# Altium PCB EMv2MainBoard.PcbDoc
Units mm, origin at the board's own origin, x right, y up, seen from the top; angles counter-clockwise.
Board outline 99.95 x 99.95 mm, 2 copper layers (Top Layer, Bottom Layer); 115 components, 87 nets, 518 pads, 5 vias.
Unrouted connection lines stored in the file: 279.
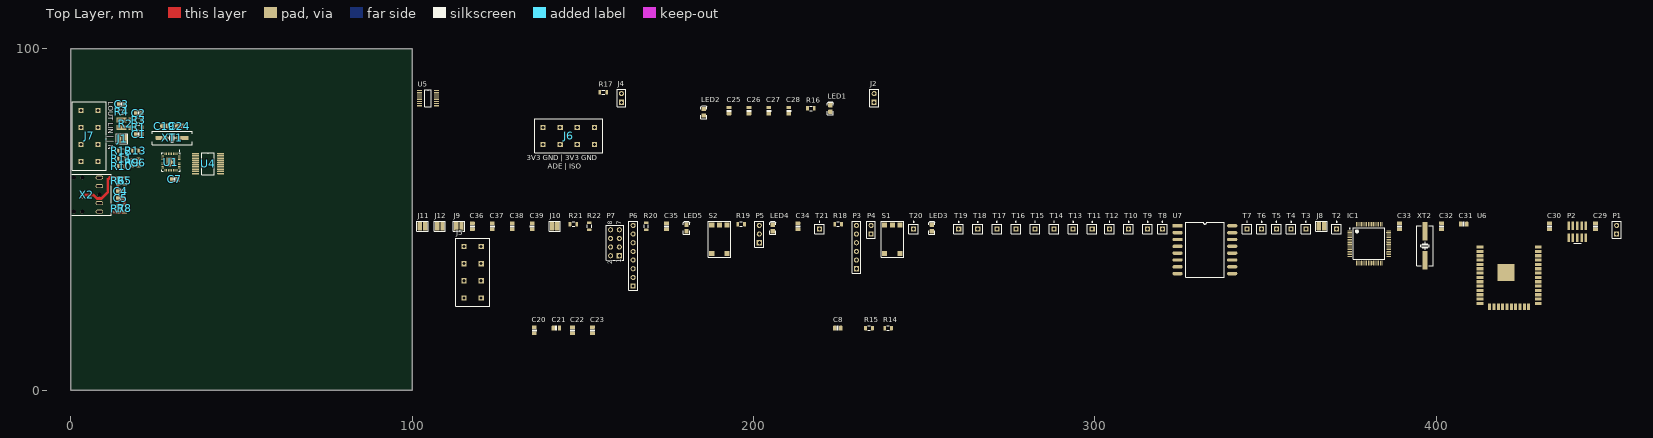
[diagram p0: Top Layer view]
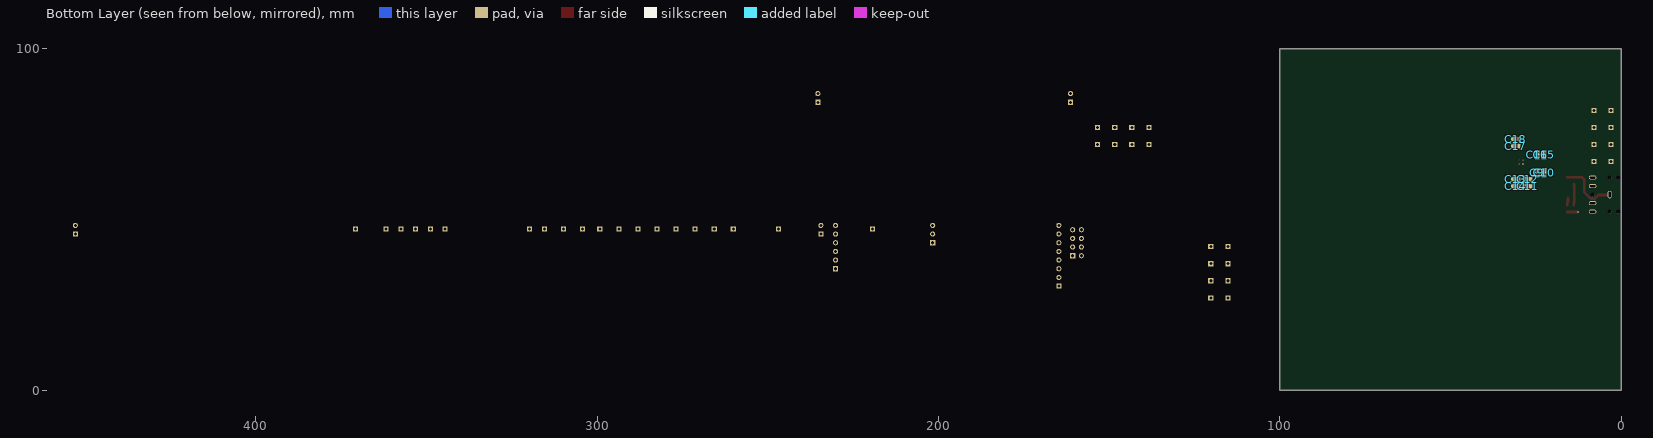
[diagram p1: Bottom Layer view, seen from below]

## Layer stack, top to bottom
Top Solder: solder mask 0.0102, Solder Resist, Dk 3.5
Top Layer: signal copper 0.0356
Dielectric 1: dielectric 0.32, FR-4, Dk 4.8
Bottom Layer: signal copper 0.0356
Bottom Solder: solder mask 0.0102, Solder Resist, Dk 3.5

## Board outline
0,0 99.949,0 99.949,99.949 0,99.949

## Design rules (kind name [scope] priority, off if disabled: settings)
Clearance [All] p1: gap=0.127 ignorepadtopadclearanceinfootprint=FALSE
ComponentClearance [All] p1 off: gap=0.254 collisioncheckmode=3 verticalgap=0.254 showdistances=FALSE
Height [All] p1 off: minheight=0 maxheight=25.4 prefheight=12.7
PolygonConnect [All] p1: connectstyle=Relief reliefconductorwidth=0.254 reliefentries=4 polygonreliefangle="90 Angle" airgapwidth=0.254
RoomDefinition Isolation_Circuit [InComponentClass('Isolation_Circuit')] p1 off: confinementstyle=ConfineIn formatcopy=TRUE lockcomponents=FALSE outline 101.092,53.467 265.938,53.467 265.938,90.932 101.092,90.932
RoomDefinition Designator [InComponentClass('Designator')] p2 off: confinementstyle=ConfineIn formatcopy=TRUE lockcomponents=FALSE outline 101.092,23.114 454.406,23.114 454.406,52.324 101.092,52.324
RoomDefinition Designator [InComponentClass('Designator')] p3 off: confinementstyle=ConfineIn formatcopy=TRUE lockcomponents=FALSE outline 101.092,23.114 454.406,23.114 454.406,52.324 101.092,52.324
RoutingVias [All] p1: holewidth=0.35 width=0.65 viastyle="Through Hole" minholewidth=0.35 minwidth=0.65 maxholewidth=0.711 maxwidth=1.27
SolderMaskExpansion [All] p1: expansion=0.102
Width [All] p1: maxlimit=2 minlimit=0.254 preferedwidth=0.254
28 further rules are at their usual default settings.

## Classes and differential pairs
component class Isolation_Circuit: C25 C26 C27 C28 J2 J4 J5 J6 J7 LED1 LED2 R16 R17 U4 U5
component class Designator: C29 C30 C31 C32 C33 C34 C35 C36 C37 C38 C39 IC1 J8 J9 J10 J11 J12 LED3 LED4 LED5 P1 P2 P3 P4 P5 P6 P7 R18 R19 R20 R21 R22 S1 S2 T2 T3 T4 T5 T6 T7 T8 T9 T10 T11 T12 T13 T14 T15 T16 T17 T18 T19 T20 T21 U6 U7 XT2

## Components (designator, comment, footprint, x,y, rotation, side; value= is the part's Value field where it differs from the comment)
C1 "approved sub OK" CAPC2012X135N 19.823,74.93 r180 top value=100n
C2 "approved sub OK" CAPC2012X135N 19.801,81.153 r0 top value=100n
C3 "approved sub OK" CAPC2012X135N 14.848,83.693 r0 top value=100n
C4 "approved sub OK" CAPC2012X135N 14.639,58.293 r180 top value=100n
C5 "approved sub OK" CAPC2012X135N 14.628,56.261 r0 top value=100n
C6 "approved sub OK" CAPC2012X135N 19.812,66.686 r90 top value=15n
C7 "approved sub OK" CAPC2012X135N 30.393,61.722 r180 top value=47n
C8 "approved sub OK" CAPC2012X135N 224.663,18.161 r0 top value=1u
C9 "approved sub OK" CAPC2012X135N 24.562,63.638 r270 bottom value=4.7u
C10 "approved sub OK" CAPC2012X135N 22.53,63.627 r270 bottom value=100n
C11 "approved sub OK" CAPC2012X135N 27.356,59.69 r0 bottom value=4.7u
C12 "approved sub OK" CAPC2012X135N 27.345,61.722 r0 bottom value=100n
C13 "approved sub OK" CAPC2012X135N 30.785,61.722 r180 bottom value=470n
C14 "approved sub OK" CAPC2012X135N 30.785,59.69 r180 bottom value=100n
C15 "approved sub OK" CAPC2012X135N 22.53,68.95 r90 bottom value=4.7u
C16 "approved sub OK" CAPC2012X135N 24.562,68.95 r90 bottom value=100n
C17 "approved sub OK" CAPC2012X135N 30.785,71.501 r0 bottom value=4.7u
C18 "approved sub OK" CAPC2012X135N 30.785,73.533 r0 bottom value=100n
C19 "approved sub OK" CAPC2012X135N 27.472,77.343 r180 top value=20n
C20 "approved sub OK" CAPC2012X135N 135.763,17.526 r90 top value=4.7u
C21 "approved sub OK" CAPC2012X135N 142.24,18.161 r0 top value=100n
C22 "approved sub OK" CAPC2012X135N 146.939,17.526 r90 top value=4.7u
C23 "approved sub OK" CAPC2012X135N 152.781,17.526 r90 top value=100n
C24 "approved sub OK" CAPC2012X135N 31.801,77.343 r0 top value=20n
C25 "approved sub OK" CAPC2012X135N 192.786,81.915 r90 top value=100n
C26 "approved sub OK" CAPC2012X135N 198.628,81.915 r90 top value=100n
C27 "approved sub OK" CAPC2012X135N 204.47,81.915 r90 top value=100n
C28 "approved sub OK" CAPC2012X135N 210.312,81.915 r90 top value=100n
C29 "approved sub OK" CAPC2012X135N 446.659,48.006 r90 top value=10u
C30 "approved sub OK" CAPC2012X135N 433.197,48.006 r90 top value=100n
C31 "approved sub OK" CAPC2012X135N 408.051,48.641 r0 top value=4.7u
C32 "approved sub OK" CAPC2012X135N 401.574,48.006 r90 top value=27p
C33 "approved sub OK" CAPC2012X135N 389.255,48.006 r90 top value=27p
C34 "approved sub OK" CAPC2012X135N 212.979,48.006 r90 top value=100n
C35 "approved sub OK" CAPC2012X135N 174.498,48.006 r90 top value=100n
C36 "approved sub OK" CAPC2012X135N 117.602,48.006 r90 top value=100n
C37 "approved sub OK" CAPC2012X135N 123.444,48.006 r90 top value=100n
C38 "approved sub OK" CAPC2012X135N 129.286,48.006 r90 top value=100n
C39 "approved sub OK" CAPC2012X135N 135.128,48.006 r90 top value=100n
IC1 "STM32F410RBT6" STM32F410RBT6 380.365,42.926 r0 top
J1 "Jumper" JUMP1 14.986,73.66 r180 top
J2 "Jumper" HDR1X2 235.331,84.328 r90 top
J4 "Jumper" HDR1X2 161.29,84.328 r90 top
J5 "SPTAF 1/4-5-LL" "SPTAF 1/4-5-LL" 115.189,42.037 r0 top
J6 "SPTAF 1/4-5-LL" "SPTAF 1/4-5-LL" 138.336,71.962 r90 top
J7 "SPTAF 1/4-5-LL" "SPTAF 1/4-5-LL" 7.921,66.962 r180 top
J8 "Jumper" JUMP1 366.395,48.006 r0 top
J9 "Jumper" JUMP1 113.665,48.006 r0 top
J10 "Jumper" JUMP1 141.732,48.006 r0 top
J11 "Jumper" JUMP1 102.997,48.006 r0 top
J12 "Jumper" JUMP1 108.077,48.006 r0 top
LED1 "Green" LED-0805-K 222.504,82.486 r90 top
LED2 "Green" LED-0805-K 185.42,81.407 r90 top
LED3 "Green" LED-0805-K 252.222,47.498 r90 top
LED4 "Green" LED-0805-K 205.613,47.498 r90 top
LED5 "Green" LED-0805-K 180.34,47.498 r90 top
P1 "Header 2" HDR1X2 452.882,45.72 r90 top
P2 "SWD connector" "SWD connector" 438.785,44.704 r0 top
P3 "Header 6" HDR1X6 230.124,35.56 r90 top
P4 "Header 2" HDR1X2 234.442,45.72 r90 top
P5 "Header 3" HDR1X3 201.676,43.18 r90 top
P6 "LCD" HDR1X8 164.719,30.48 r90 top
P7 "NRF24L01" HDR2X4 160.655,39.37 r90 top
R1 "Thick Film" RESC2012X70N 19.812,76.962 r180 top value=100K
R2 "WSK1216" WSK1216 14.859,79.121 r270 top
R3 "Thick Film" RESC2012X70N 19.828,79.121 r180 top value=100K
R4 "Thick Film" RESC2012X70N 14.875,81.534 r0 top value=0R
R5 "Thick Film" RESC2012X70N 15.748,61.341 r90 top value=100K
R6 "Thick Film" RESC2012X70N 13.843,61.341 r270 top value=100K
R7 "Thick Film" RESC2012X70N 13.843,53.197 r270 top value=100K
R8 "Thick Film" RESC2012X70N 15.748,53.213 r270 top value=100K
R9 "Thick Film" RESC2012X70N 17.907,66.675 r90 top value=1K
R10 "Thick Film" RESC2012X70N 14.843,65.532 r180 top value=250K
R11 "Thick Film" RESC2012X70N 14.875,67.818 r0 top value=250K
R12 "Thick Film" RESC2012X70N 14.875,70.104 r180 top value=250K
R13 "Thick Film" RESC2012X70N 18.923,70.104 r180 top value=250K
R14 "Thick Film" RESC2012X70N 239.395,18.161 r0 top value=10K
R15 "Thick Film" RESC2012X70N 233.807,18.161 r0 top value=10K
R16 "Thick Film" RESC2012X70N 216.789,82.55 r0 top value=1K
R17 "Thick Film" RESC2012X70N 155.956,87.249 r0 top value=1K
R18 "Thick Film" RESC2012X70N 224.79,48.641 r0 top value=1K
R19 "Thick Film" RESC2012X70N 196.342,48.641 r0 top value=1K
R20 "Thick Film" RESC2012X70N 168.529,48.006 r90 top value=1K
R21 "Thick Film" RESC2012X70N 147.193,48.641 r0 top value=1K
R22 "Thick Film" RESC2012X70N 151.892,48.006 r90 top value=1K
S1 "SMD_BUTTON" SMD_BUTTON 240.665,44.196 r90 top
S2 "SMD_BUTTON" SMD_BUTTON 189.992,44.196 r90 top
T2 "Test Point" PIN1 370.84,47.244 r0 top
T3 "Test Point" PIN1 361.823,47.244 r0 top
T4 "Test Point" PIN1 357.505,47.244 r0 top
T5 "Test Point" PIN1 353.187,47.244 r0 top
T6 "Test Point" PIN1 348.869,47.244 r0 top
T7 "Test Point" PIN1 344.551,47.244 r0 top
T8 "Test Point" PIN1 319.786,47.244 r0 top
T9 "Test Point" PIN1 315.468,47.244 r0 top
T10 "Test Point" PIN1 309.88,47.244 r0 top
T11 "Test Point" PIN1 299.212,47.244 r0 top
T12 "Test Point" PIN1 304.292,47.244 r0 top
T13 "Test Point" PIN1 293.624,47.244 r0 top
T14 "Test Point" PIN1 288.036,47.244 r0 top
T15 "Test Point" PIN1 282.448,47.244 r0 top
T16 "Test Point" PIN1 276.86,47.244 r0 top
T17 "Test Point" PIN1 271.272,47.244 r0 top
T18 "Test Point" PIN1 265.684,47.244 r0 top
T19 "Test Point" PIN1 260.096,47.244 r0 top
T20 "Test Point" PIN1 246.888,47.244 r0 top
T21 "Test Point" PIN1 219.329,47.244 r0 top
U1 "ADE9153A" CP-32-12_L 29.261,66.802 r270 top
U4 "MAX14483" SSOP20 36.5,69.29 r0 top
U5 "SI8663BB-B-IU" QSOP16 102.108,87.757 r0 top
U6 "ESP32-WROOM-32U" ESP32-WROOM-32U 412.877,41.91 r0 top
U7 "Ra-02 LoRa" "Ra-02 LoRa" 324.231,48.133 r0 top
X2 "35RAPC4BHN2" "35RAPC _ _ HN2" 4.572,57.277 r0 top
XT1 "12.288 MHz" ABLS7M2 29.642,73.914 r180 top
XT2 "20.00MHz" CRYSTAL_HC49-US-SM 396.748,42.291 r90 top

## Footprints (in the part's own frame and the unit in brackets; to place one, negate y for a bottom-side part, rotate by r counter-clockwise, add the part's x,y. Pads: shape width x height; smd on the part's side, far side on the other; paste and mask are expansions set on the pad)
"35RAPC _ _ HN2" [mm] "Switchcraft 3.5mm audio jack"
  round 1 hole 1.2 unplated: 0(-3.75,-5) 0(-3.75,5) 0(-1.25,-5) 0(-1.25,5) 0(3.75,0)
  oval 1.2x2.2 hole 0.6 slot 1.6 at 90 deg: 1(-1.25,0)
  oval 2.2x1.2 hole 0.6 slot 1.6 at 0 deg: 2(3.75,-5) 3(3.75,5) 10(3.75,-2.5) 11(3.75,2.5)
  silkscreen extent -4.35,-6 7.25,6, body extent -7.75,-6 6.25,6, height 5.7
ABLS7M2 [mm] "SMD Crystal HC49/US-SM package"
  round 0.508 on Mech15: 0(0,0)
  rrect25% 3.5x1.2 smd: 1(-3.07,0) 2(3.07,0)
  silkscreen extent -5.84,-1.96 5.84,1.96
CAPC2012X135N [mm] "Chip Capacitor, Body 2.0x1.2mm, EIA 0805, IPC Medium Density"
  round 0.254 on Mech15: 0(0,0)
  rrect25% 1x1.4 smd: 1(-0.9,0) 2(0.9,0)
  Top Layer pour cut-out: -0.675,0.7 -0.475,0.9 0.475,0.9 0.675,0.7 0.675,-0.7 0.475,-0.9 -0.475,-0.9 -0.675,-0.7
  silkscreen extent -0.15,-0.65 0.15,0.65, body extent -1.1,-0.72 1.1,0.73, height 1.34
CP-32-12_L [mm] "QFN, 32-Leads, Body 5x5mm, Pitch 0.5mm, Thermal Pad 2.6x2.6mm, IPC High Density"
  oval 0.75x0.25 smd: 1(-2.425,1.75) 2(-2.425,1.25) 3(-2.425,0.75) 4(-2.425,0.25) 5(-2.425,-0.25) 6(-2.425,-0.75) 7(-2.425,-1.25) 8(-2.425,-1.75) 17(2.425,-1.75) 18(2.425,-1.25) 19(2.425,-0.75) 20(2.425,-0.25) 21(2.425,0.25) 22(2.425,0.75) 23(2.425,1.25) 24(2.425,1.75)
  oval 0.25x0.75 smd: 9(-1.75,-2.425) 10(-1.25,-2.425) 11(-0.75,-2.425) 12(-0.25,-2.425) 13(0.25,-2.425) 14(0.75,-2.425) 15(1.25,-2.425) 16(1.75,-2.425) 25(1.75,2.425) 26(1.25,2.425) 27(0.75,2.425) 28(0.25,2.425) 29(-0.25,2.425) 30(-0.75,2.425) 31(-1.25,2.425) 32(-1.75,2.425)
  rect 2.6x2.6 smd: 33(0,0)
  silkscreen extent -3.47,-2.7 2.7,2.7, body extent -2.55,-2.55 2.55,2.55, height 0.8
CRYSTAL_HC49-US-SM [mm] "SMD Crystal HC49/US-SM package"
  round 0.508 on Mech15: 0(0,0)
  rrect25% 5.5x1.5 smd: 1(-4.25,0) 2(4.25,0)
  silkscreen extent -5.84,-2.41 5.84,2.41, body extent -6.4,-2.41 6.4,2.42, height 4.29
ESP32-WROOM-32U [mm]
  rect 2x0.9 smd: 1(0,0) 2(0,-1.27) 3(0,-2.54) 4(0,-3.81) 5(0,-5.08) 6(0,-6.35) 7(0,-7.62) 8(0,-8.89) 9(0,-10.16) 10(0,-11.43) 11(0,-12.7) 12(0,-13.97) 13(0,-15.24) 14(0,-16.51) 25(17,-16.51) 26(17,-15.24) 27(17,-13.97) 28(17,-12.7) 29(17,-11.43) 30(17,-10.16) 31(17,-8.89) 32(17,-7.62) 33(17,-6.35) 34(17,-5.08) 35(17,-3.81) 36(17,-2.54) 37(17,-1.27) 38(17,0)
  rect 0.9x2 smd: 15(2.78,-17.51) 16(4.05,-17.51) 17(5.32,-17.51) 18(6.59,-17.51) 19(7.86,-17.51) 20(9.13,-17.51) 21(10.4,-17.51) 22(11.67,-17.51) 23(12.94,-17.51) 24(14.21,-17.51)
  rect 5x5 smd: 38(7.56,-7.47)
  body extent -0.57,-17.89 17.51,7.65, height 3
HDR1X2 [mm] "Connector; Header; 2 Position"
  rect 1.5x1.5 hole 0.9: 1(0,0)
  round 1.5 hole 0.9: 2(2.54,0)
  silkscreen extent -1.27,-1.27 3.81,1.27
HDR1X3 [mm] "Connector; Header; 3 Position"
  rect 1.5x1.5 hole 0.9: 1(0,0)
  round 1.5 hole 0.9: 2(2.54,0) 3(5.08,0)
  silkscreen extent -1.27,-1.27 6.35,1.27
HDR1X6 [mm] "Connector; Header; 6 Position"
  rect 1.5x1.5 hole 0.9: 1(0,0)
  round 1.5 hole 0.9: 2(2.54,0) 3(5.08,0) 4(7.62,0) 5(10.16,0) 6(12.7,0)
  silkscreen extent -1.27,-1.27 13.97,1.27
HDR1X8 [mm] "Connector; Header; 8 Position"
  rect 1.5x1.5 hole 0.9: 1(0,0)
  round 1.5 hole 0.9: 2(2.54,0) 3(5.08,0) 4(7.62,0) 5(10.16,0) 6(12.7,0) 7(15.24,0) 8(17.78,0)
  silkscreen extent -1.27,-1.27 19.05,1.27
HDR2X4 [mm] "Connector; Header; 4x2 Position"
  rect 1.5x1.5 hole 0.9: 1(0,0)
  round 1.5 hole 0.9: 2(0,2.54) 3(2.54,0) 4(2.54,2.54) 5(5.08,0) 6(5.08,2.54) 7(7.62,0) 8(7.62,2.54)
  silkscreen extent -1.27,-1.27 8.89,3.81
JUMP1 [mil] "SMT Battery jumper pads"
  rrect25% 50x100 smd: 1(-30,0) 2(30,0)
  rrect25% 118x108 on Top Solder: SM(0,0)
  silkscreen extent -65,-60 65,60
LED-0805-K [mil]
  round 20 on Mech15: 0(0,0)
  rrect25% 50x50 smd: A(-37.5,0) K(37.5,0)
  Top Layer pour cut-out: -15,30 15,30 15,-30 -15,-30
  silkscreen extent -72,-35 77,35, body extent -39,-25 39,25, height 31
PIN1 [mm] "Generic Antenna; 1 Lead"
  rect 1.5x1.5 hole 0.9: 1(0,0)
  silkscreen extent -1.4,-1.4 1.4,2.17
QSOP16 [mm]
  rect 1.45x0.35 smd: 1(0,0)
  oval 1.45x0.35 smd: 2(0,-0.635) 3(0,-1.27) 4(0,-1.905) 5(0,-2.54) 6(0,-3.175) 7(0,-3.81) 8(0,-4.445) 9(5,-4.445) 10(5,-3.81) 11(5,-3.175) 12(5,-2.54) 13(5,-1.905) 14(5,-1.27) 15(5,-0.635) 16(5,0)
  silkscreen extent 1.56,-4.76 3.44,0.32, body extent -0.59,-4.71 5.61,0.27, height 1.75
"Ra-02 LoRa" [mm]
  rect 3x1 smd: 1(0,0)
  oval 3x1 smd: 2(0,-2) 3(0,-4) 4(0,-6) 5(0,-8) 6(0,-10) 7(0,-12) 8(0,-14) 9(16,-14) 10(16,-12) 11(16,-10) 12(16,-8) 13(16,-6) 14(16,-4) 15(16,-2) 16(16,0)
  silkscreen extent 2.33,-15 13.67,1, body extent -0.21,-15.51 15.79,1.49, height 3.2
RESC2012X70N [mm] "Chip Resistor, Body 2.0x1.2mm, EIA 0805, IPC Medium Density"
  round 0.254 on Mech15: 0(0,0)
  rrect25% 0.8x1.3 smd: 1(-1,0) 2(1,0)
  Top Layer pour cut-out: -0.725,0.65 -0.525,0.85 0.525,0.85 0.725,0.65 0.725,-0.65 0.525,-0.85 -0.525,-0.85 -0.725,-0.65
  silkscreen extent -0.38,-0.64 0.38,0.64, body extent -1.1,-0.67 1.1,0.68, height 0.69
SMD_BUTTON [mm]
  rect 1.5x1.5 smd: 1(-4.204,2.261) 1(4.204,2.261) 2(-4.204,-2.261) 2(4.204,-2.261) 5(4.204,0)
  silkscreen extent -5.22,-3.33 5.32,3.28, body extent -3.95,-3.3 4.05,3.2, height 3.1
"SPTAF 1/4-5-LL" [mm]
  rect 1.5x1.5 hole 0.9: 1(0,0) 1(5,0) 2(0,-5) 2(5,-5) 3(0,-10) 3(5,-10) 4(0,-15) 4(5,-15)
  silkscreen extent -2.44,-17.5 7.56,2.5
SSOP20 [mm]
  rect 2.1x0.45 smd: 1(0,0)
  oval 2.1x0.45 smd: 2(0,-0.65) 3(0,-1.3) 4(0,-1.95) 5(0,-2.6) 6(0,-3.25) 7(0,-3.9) 8(0,-4.55) 9(0,-5.2) 10(0,-5.85) 11(7.35,-5.85) 12(7.35,-5.2) 13(7.35,-4.55) 14(7.35,-3.9) 15(7.35,-3.25) 16(7.35,-2.6) 17(7.35,-1.95) 18(7.35,-1.3) 19(7.35,-0.65) 20(7.35,0)
  silkscreen extent 1.89,-6.18 5.47,0.33, body extent -0.25,-6.6 7.65,0.73, height 3
STM32F410RBT6 [mm] "TSQFP, 64-Leads, Body 10.00x10.00mm, Pitch 0.50mm, IPC Medium Density"
  oval 1.4x0.3 smd: 1(-5.7,3.75) 2(-5.7,3.25) 3(-5.7,2.75) 4(-5.7,2.25) 5(-5.7,1.75) 6(-5.7,1.25) 7(-5.7,0.75) 8(-5.7,0.25) 9(-5.7,-0.25) 10(-5.7,-0.75) 11(-5.7,-1.25) 12(-5.7,-1.75) 13(-5.7,-2.25) 14(-5.7,-2.75) 15(-5.7,-3.25) 16(-5.7,-3.75) 33(5.7,-3.75) 34(5.7,-3.25) 35(5.7,-2.75) 36(5.7,-2.25) 37(5.7,-1.75) 38(5.7,-1.25) 39(5.7,-0.75) 40(5.7,-0.25) 41(5.7,0.25) 42(5.7,0.75) 43(5.7,1.25) 44(5.7,1.75) 45(5.7,2.25) 46(5.7,2.75) 47(5.7,3.25) 48(5.7,3.75)
  oval 0.3x1.4 smd: 17(-3.75,-5.7) 18(-3.25,-5.7) 19(-2.75,-5.7) 20(-2.25,-5.7) 21(-1.75,-5.7) 22(-1.25,-5.7) 23(-0.75,-5.7) 24(-0.25,-5.7) 25(0.25,-5.7) 26(0.75,-5.7) 27(1.25,-5.7) 28(1.75,-5.7) 29(2.25,-5.7) 30(2.75,-5.7) 31(3.25,-5.7) 32(3.75,-5.7) 49(3.75,5.7) 50(3.25,5.7) 51(2.75,5.7) 52(2.25,5.7) 53(1.75,5.7) 54(1.25,5.7) 55(0.75,5.7) 56(0.25,5.7) 57(-0.25,5.7) 58(-0.75,5.7) 59(-1.25,5.7) 60(-1.75,5.7) 61(-2.25,5.7) 62(-2.75,5.7) 63(-3.25,5.7) 64(-3.75,5.7)
  silkscreen extent -5.82,-4.6 4.6,4.6, body extent -5,-5 5,5, height 1.6
"SWD connector" [mm]
  rect 0.7x2.5 smd: 1(0,0) 2(0,3.49) 3(1.27,0) 4(1.27,3.49) 5(2.54,0) 6(2.54,3.49) 7(3.81,0) 8(3.81,3.49) 9(5.08,0) 10(5.08,3.49)
  silkscreen extent 1.46,-1.73 3.75,-1.73, body extent -0.64,-0.98 5.71,4.52, height 4.6
WSK1216 [mm] "Power Metal Strip Resistors, Low Value,  High Power, Surface-Mount, 4-Terminal"
  rect 1.495x2.95 smd: 1(0,0) 2(2.14,0)
  rect 1.495x0.7 smd: 3(-0.01,2.33) 4(2.14,2.33)

## Part data
C1 C2 C3 C4 C5 C6 C7 C8 C9 C10 C11 C12 C13 C14 C15 C16 C17 C18 C19 C20 C21 C22 C23 C24 C25 C26 C27 C28 C29 C30 C31 C34 C35 C36 C37 C38 C39: library part CAPC_100n_0805_X7R_50V_10%, "Capacitor SMD Cer 100nF 10% 50V X7R 0805", Manufacturer 1=Kemet, Manufacturer Part Number 1=C0805C104K5RACTU, Package / Case="0805 (2012 metric)", Ratings="50V; X7R", Supplier Part Number 1=399-1170-1-ND, Tolerance=±10%, Material=ceramic, SCDType=undef, Supplier 1=Digi-Key
C32 C33: library part CAPC_27p_0805_NP0_50V_5%, "Capacitor SMD Cer 27pF 5% 50V NP0 0805", Manufacturer 1="Panasonic - ECG", Manufacturer Part Number 1=ECJ-2VC1H270J, Operating Temperature="-55°C ~ 125°C", Package / Case="0805 (2012 metric)", Ratings="50V; NP0", Supplier Part Number 1=PCC270CGCT-ND, Tolerance=±5%, SCDType=undef, Supplier 1=Digi-Key
IC1: Manufacturer=STMICROELECTRONICS, Component Type=IC, Manufacturer Part No=STM32F410RBT6
J1 J2 J4 J8 J9 J10 J11 J12: library part JUMP1, "SMD jumper"
LED1 LED2 LED3 LED4 LED5: library part LED_SMD_Green_0805_6mcd, "LED, 0805 SMD, Green", Manufacturer 1=LITE-ON, Manufacturer Part Number 1=LTST-C171GKT, Package / Case=0805, Ratings="6 mcd; 569 nm", Supplier Part Number 1=160-1423-1-ND, Color=Green, Material=GaP, SCDType=source, Supplier 1=Digi-Key
P1 P4: "Header, 2-Pin", LatestRevisionDate=17-Jul-2002, LatestRevisionNote="Re-released for DXP Platform.", Publisher="Altium Limited"
P2: library part SW_debug
P3: "Header, 6-Pin", LatestRevisionDate=17-Jul-2002, LatestRevisionNote="Re-released for DXP Platform.", Publisher="Altium Limited"
P5: "Header, 3-Pin", LatestRevisionDate=17-Jul-2002, LatestRevisionNote="Re-released for DXP Platform.", Publisher="Altium Limited"
P6: library part "Header 8", "Header, 8-Pin", LatestRevisionDate=17-Jul-2002, LatestRevisionNote="Re-released for DXP Platform.", Publisher="Altium Limited"
P7: library part "Header 4X2", "Header, 4-Pin, Dual row", LatestRevisionDate=17-Jul-2002, LatestRevisionNote="Re-released for DXP Platform.", Publisher="Altium Limited"
R1 R3 R4 R5 R6 R7 R8 R9 R10 R11 R12 R13 R14 R15: library part RES_100K_0805_1%, "Resistor SMD chip 100k Ohm 0.125W 1% 0805", Manufacturer 1=Vishay/Dale, Manufacturer Part Number 1=CRCW0805100KFKEA, Package / Case="0805 (2012 metric)", Ratings=1/8W, Supplier Part Number 1=541-100KCCT-ND, SCDType=spec, Supplier 1=Digi-Key
R2: library part wsk1216, "Power Metal Strip® Resistors, Low Value, / High Power, Surface-Mount, 4-Terminal", Mouser=71-WSK12161L000FEA
R16 R17 R18 R19 R20 R21 R22: library part RES_1K_0805_1%, "Resistor SMD chip 1k Ohm 0.125W 1% 0805", Manufacturer 1=Vishay/Dale, Manufacturer Part Number 1=CRCW08051K00FKEA, Package / Case="0805 (2012 metric)", Ratings=1/8W, Supplier Part Number 1=541-1.00KCCT-ND, Tolerance=±1%, SCDType=spec, Supplier 1=Digi-Key
T2 T3 T4 T5 T6 T7 T8 T9 T10 T11 T12 T13 T14 T15 T16 T17 T18 T19 T20 T21: library part Test_Point
U1: "Energy Metering IC with Autocalibration", Mouser=584-ADE9153AACPZ
U4: "6-Channel, Low-Power, / 3.75kVRMS, SPI Digital Isolator", Mouser=700-MAX14483AAP+
U5: library part Si8663BC-B-IS1, "Low Power Six-Channel Digital Isolator, 150 Mbps, 3.75 kVRMS Isolation Rating, -40 to 125 degC, 16-pin SOIC", Isolation Rating (kV)=3.75, Manufacturer="Silicon Labs", Supplier Part Number 1=336-2128-5-ND, 10kV surge=FALSE, AEC-Q100=FALSE, Channel Type=Unidirectional, Code_IPC=J-STD-020, Code_JEDEC=MS-012, ComponentLink1Description="Manufacturer URL", ComponentLink1URL=http://www.silabs.com/, ComponentLink2Description=Datasheet, ComponentLink2URL=http://www.silabs.com/Support%20Documents/TechnicalDocs/Si866x.pdf, ComponentLink3Description="Package Specification", ComponentLink3URL=http://www.silabs.com/Support%20Documents/TechnicalDocs/si2401.pdf, DatasheetVersion="Rev. 1.4", Enable Control=FALSE, Maximum Data Rate (Mbps)=150, Maximum Propagation Delay (ns)=13, Mounting Technology="Surface Mount", Mouser=634-SI8660BB-B-IU, PackageDescription="16-Pin Small-Outline Integrated Circuit, Body 9.9 x 3.9 mm, Pitch 1.27 mm", PackageReference=SOIC-16-NB, PartNumber=Si8663BC-B-IS1, Sub-Family=Isolators, Supplier 1=Digi-Key, Supplier 2=Mouser, Supplier Part Number 2=634-SI8663BC-B-IS1
U6: "Wi-Fi+BT+BLE MCU modules", ComponentLink1Description=Espressif, ComponentLink1URL=https://hr.mouser.com/datasheet/2/891/esp32-wroom-32d_esp32-wroom-32u_datasheet_en-1365844.pdf, Mouser=356-ES32WROOM32U16MB
X2: library part "Audio jack 35RAPC4BHN2", "Switchcraft 35RAPC4BHN2, 3.5mm stereo jack"
XT1 XT2: library part Crystal_6MHz_HC49/US, "Resonator Ceramic 6.00 MHz 30ppm", Frequency=6MHz, Frequency Stability=±50ppm, Frequency Tolerance=±30ppm, Load Capacitance=18pF, Manufacturer 1="CTS-Frequency Controls", Manufacturer Part Number 1=ATS060BSM-1, Operating Mode=Fundamental, Operating Temperature="-20°C ~ 70°C", Package / Case=HC49/US-SM, Ratings="6.00 MHz", Supplier Part Number 1=CTX882CT-ND, ComponentLink1Description=http://www.ctscorp.com/components/Datasheets/008-0309-0.pdf, ComponentLink1URL=http://www.ctscorp.com/components/Datasheets/008-0309-0.pdf, Mounting Type="Surface Mount", Parameter Name="0.169\" (4.30mm)", SCDType=spec, Size / Dimension="0.437\" L x 0.190\" W (11.10mm x 4.83mm)", Supplier 1=Digi-Key, Type="MHz Crystal"

## Via types
v1: diameter 0.5, hole 0.2, Top Layer to Bottom Layer, 4 vias
v2: diameter 0.65, hole 0.35, Top Layer to Bottom Layer, 1 vias

## Nets (pads, with @x,y where several pads share a name; then routed paths per layer and width w, separated by ;. In a path a pad name is that pad's centre, name@x,y a point inside that pad or via, vN(x,y) a via of type N, cw(c..) or ccw(c..) an arc to the next point about the centre after c; other vN are vias at no path point)
3V3-ADE: C20.1 C21.1 C22.1 C23.1 C25.1 C26.1 J2.1 J5.1 J6.1 R14.1 R15.1 R16.1 U1.5 U1.24 U4.1 U5.1
AO-LCD: IC1.8 P6.4 T16.1
AVDDOUT: C9.1 C10.1 U1.16
BOOT0: IC1.60 R21.2
BOOT1: IC1.28 R22.2
CE-NRF: IC1.41 P3.1 P7.3 T9.1
CLK-ESP: IC1.26 P5.1 P7.5 T2.1 U6.20 U7.12
CLKIN: C19.2 U1.4 XT1.2
CLKOUT: C24.2 U1.3 XT1.1
CS-ESP: IC1.44 P3.4 T13.1 U6.19
CS-LCD: IC1.9 P6.6 T17.1
CSN-NRF: IC1.42 P3.2 P7.4 T10.1
CT1: R5.2 R6.1 X2.1 | length 17.6
  Top Layer w0.8: X2.1 3.449,57.15 6.604,57.15 7.604,56.15 8.906,56.15 10.795,58.039 10.795,61.722 11.414,62.341 R6.1 R5.2
CT2: R7.2 R8.2 X2.2 | length 3.3
  Top Layer w0.8: X2.2 X2.2@8.386,52.213 ; v2(12.573,52.197) R7.2 15.732,52.197 R8.2
DVDOUT: C17.1 C18.1 U1.2
FA1: C7.2 U1.22
FA2: C7.1 U1.23
GND: C27.2 C28.2 C29.1 C30.1 C31.2 C32.1 C33.1 C34.1 C35.1 C36.2 C37.2 C38.2 C39.2 IC1.12 IC1.18 IC1.31 IC1.47 IC1.63 J5.4 J6.4 J8.2 J11.2 J12.2 LED2.K LED3.K LED4.K LED5.K P2.3 P2.5 P6.7 P7.1 S1.2 S2.2 U4.11 U4.12 U5.9 U6.1 U6.15 U6.38 U7.1 U7.2 U7.9 U7.16
GND-ADE: C1.2 C2.1 C3.2 C4.2 C5.1 C8.2 C9.2 C10.2 C11.2 C12.2 C13.2 C14.2 C15.2 C16.2 C17.2 C18.2 C19.1 C20.2 C21.2 C22.2 C23.2 C24.1 C25.2 C26.2 J1.1 J5.2 J6.2 LED1.K R6.2 R7.1 U1.1 U1.9 U1.17 U1.19 U1.20 U4.2 U4.10 U5.8 | length 6.2
  Top Layer w0.8: R7.1 13.843,54.864 13.716,54.991 13.716,58.27 C4.2 13.739,60.237 R6.2
IAMS: C3.1 R4.1 U1.6
IAN: C2.2 R3.1 U1.7
IAP: C1.1 R1.1 U1.8
IBN: C4.1 R5.1 U1.11
IBP: C5.2 R8.1 U1.12 | length 2.1
  Top Layer w0.8: C5.2 15.528,55.211 15.748,54.991 R8.1
IRQ-NRF: IC1.46 P3.6 P7.8 T15.1
LED1: IC1.51 R18.1
LED2: IC1.50 R19.1
LED3: IC1.49 R20.1
MISO-ESP: IC1.45 P3.5 P7.7 T14.1 U6.22 U7.13
MISO-LCD: IC1.10 P6.5 T18.1
MOSI-ESP: IC1.43 P3.3 P7.6 T11.1 U6.21 U7.14
MOSI-LCD: IC1.11 P6.3 T19.1
MSH: C13.1 C14.1 U1.21
NetC31_1: C31.1 IC1.30
NetIC1_17: IC1.17 T4.1 U5.14
NetIC1_20: IC1.20 T5.1 U5.12
NetIC1_21: IC1.21 T6.1 U4.14
NetIC1_22: IC1.22 T7.1 U4.17
NetIC1_23: IC1.23 T8.1 U4.15
NetIC1_24: IC1.24 T20.1 U4.13
NetIC1_25: IC1.25 T21.1 U5.15
NetIC1_27: IC1.27 T3.1 U5.13
NetJ1_2: J1.2 J7.3 R2.2
NetJ2_2: J2.2
NetJ3_1: 
NetJ3_4: J7.1 R10.2
NetJ4_2: J4.2
NetJ7_4: J7.4 R2.1 R4.2
NetJ8_1: J8.1 U6.25
NetJ9_2: J9.2 J11.1 R21.1
NetJ10_2: J10.2 J12.1 R22.1
NetLED1_A: LED1.A R16.2
NetLED2_A: LED2.A R17.2
NetLED3_A: LED3.A R18.2
NetLED4_A: LED4.A R19.2
NetLED5_A: LED5.A R20.2
NetR1_2: R1.2 R2.4
NetR2_3: R2.3 R3.2
NetR10_1: R10.1 R11.2
NetR11_1: R11.1 R12.2
NetR12_1: R12.1 R13.2
NetU1_25: U1.25 U5.3
NetU1_26: U1.26 U5.2
NetU1_27: U1.27 U5.4
NetU1_29: U1.29 U4.6
NetU1_30: U1.30 U4.4
NetU1_31: U1.31 U4.7
NSS-LORA: IC1.33 P5.2 U7.15
REFIN: C11.1 C12.1 U1.18
RES-ADE-HOT: C8.1 R15.2 U1.28 U5.5
RES-LORA: IC1.36 P5.3 U7.4
RESET: IC1.7 P2.10
RXD0-ESP32: IC1.37 P1.2 P4.1 U6.34
SCLK-LCD: IC1.29 P6.2 T12.1
SS-ADE-HOT: R14.2 U1.32 U4.8
SW1: C34.2 IC1.52 S1.1
SW2: C35.2 IC1.53 S2.1
SWCLK: IC1.35 P2.4
SWDIO: IC1.34 P2.2
SWO: IC1.55 P2.6
TXD0-ESP32: IC1.38 P1.1 P4.2 U6.35
VAN: C6.1 R9.1 U1.13 U1.15
VAP: C6.2 R9.2 R13.1 U1.14
VCC: C27.1 C28.1 C29.2 C30.2 C36.1 C37.1 C38.1 C39.1 IC1.1 IC1.13 IC1.19 IC1.32 IC1.48 IC1.64 J4.1 J5.3 J6.3 J9.1 J10.1 P2.1 P6.1 P6.8 P7.2 R17.1 U4.20 U5.16 U6.2 U6.3 U7.3
VDDOUT: C15.1 C16.1 U1.10
XT1-1: C32.2 IC1.5 XT2.2
XT1-2: C33.2 IC1.6 XT2.1
pads on no net: C1.0 C2.0 C3.0 C4.0 C5.0 C6.0 C7.0 C8.0 C9.0 C10.0 C11.0 C12.0 C13.0 C14.0 C15.0 C16.0 C17.0 C18.0 C19.0 C20.0 C21.0 C22.0 C23.0 C24.0 C25.0 C26.0 C27.0 C28.0 C29.0 C30.0 C31.0 C32.0 C33.0 C34.0 C35.0 C36.0 C37.0 C38.0 C39.0 IC1.2 IC1.3 IC1.4 IC1.14 IC1.15 IC1.16 IC1.39 IC1.40 IC1.54 IC1.56 IC1.57 IC1.58 IC1.59 IC1.61 IC1.62 J1.SM J7.2 J8.SM J9.SM J10.SM J11.SM J12.SM LED1.0 LED2.0 LED3.0 LED4.0 LED5.0 P2.7 P2.8 P2.9 R1.0 R3.0 R4.0 R5.0 R6.0 R7.0 R8.0 R9.0 R10.0 R11.0 R12.0 R13.0 R14.0 R15.0 R16.0 R17.0 R18.0 R19.0 R20.0 R21.0 R22.0 S1.5 S2.5 U1.33 U4.3 U4.5 U4.9 U4.16 U4.18 U4.19 U5.6 U5.7 U5.10 U5.11 U6.4 U6.5 U6.6 U6.7 U6.8 U6.9 U6.10 U6.11 U6.12 U6.13 U6.14 U6.16 U6.17 U6.18 U6.23 U6.24 U6.26 U6.27 U6.28 U6.29 U6.30 U6.31 U6.32 U6.33 U6.36 U6.37 U7.5 U7.6 U7.7 U7.8 U7.10 U7.11 X2.0 X2.3 X2.10 X2.11 XT1.0 XT2.0
copper on no net:
  other v1: 28.711,66.252 29.811,66.252 28.711,67.352 29.811,67.352

## Silkscreen, mask and mechanical layers (free items; w line width, h text height)
Top Overlay:
  text "LOUT LIN | | N" at 10.922,84.455 h1.52 r270
  text "3V3 GND | 3V3 GND" at 133.604,67.31 h1.52
  text "ADE | ISO" at 139.7,64.897 h1.52

## Text inside footprints (layer, text, board x,y; h text height)
P7: Top Overlay "2" at 158.623,36.83 h1.27 r90; Top Overlay "1" at 161.163,37.338 h1.27 r90; Top Overlay "7" at 161.163,48.514 h1.27 r90; Top Overlay "8" at 158.623,48.514 h1.27 r90
X2: Mechanical 2 "Prednji dio konektora" at -2.978,59.477 h0.5 r270; Mechanical 2 "Rub tiskane pločice" at 0.222,59.277 h0.5 r270